# Altium PCB PCB2.PcbDoc
Units mm, origin at the board's own origin, x right, y up, seen from the top; angles counter-clockwise.
Board outline 117.23 x 67.03 mm, 2 copper layers (Top Layer, Bottom Layer); 38 components, 28 nets, 198 pads, 268 vias.
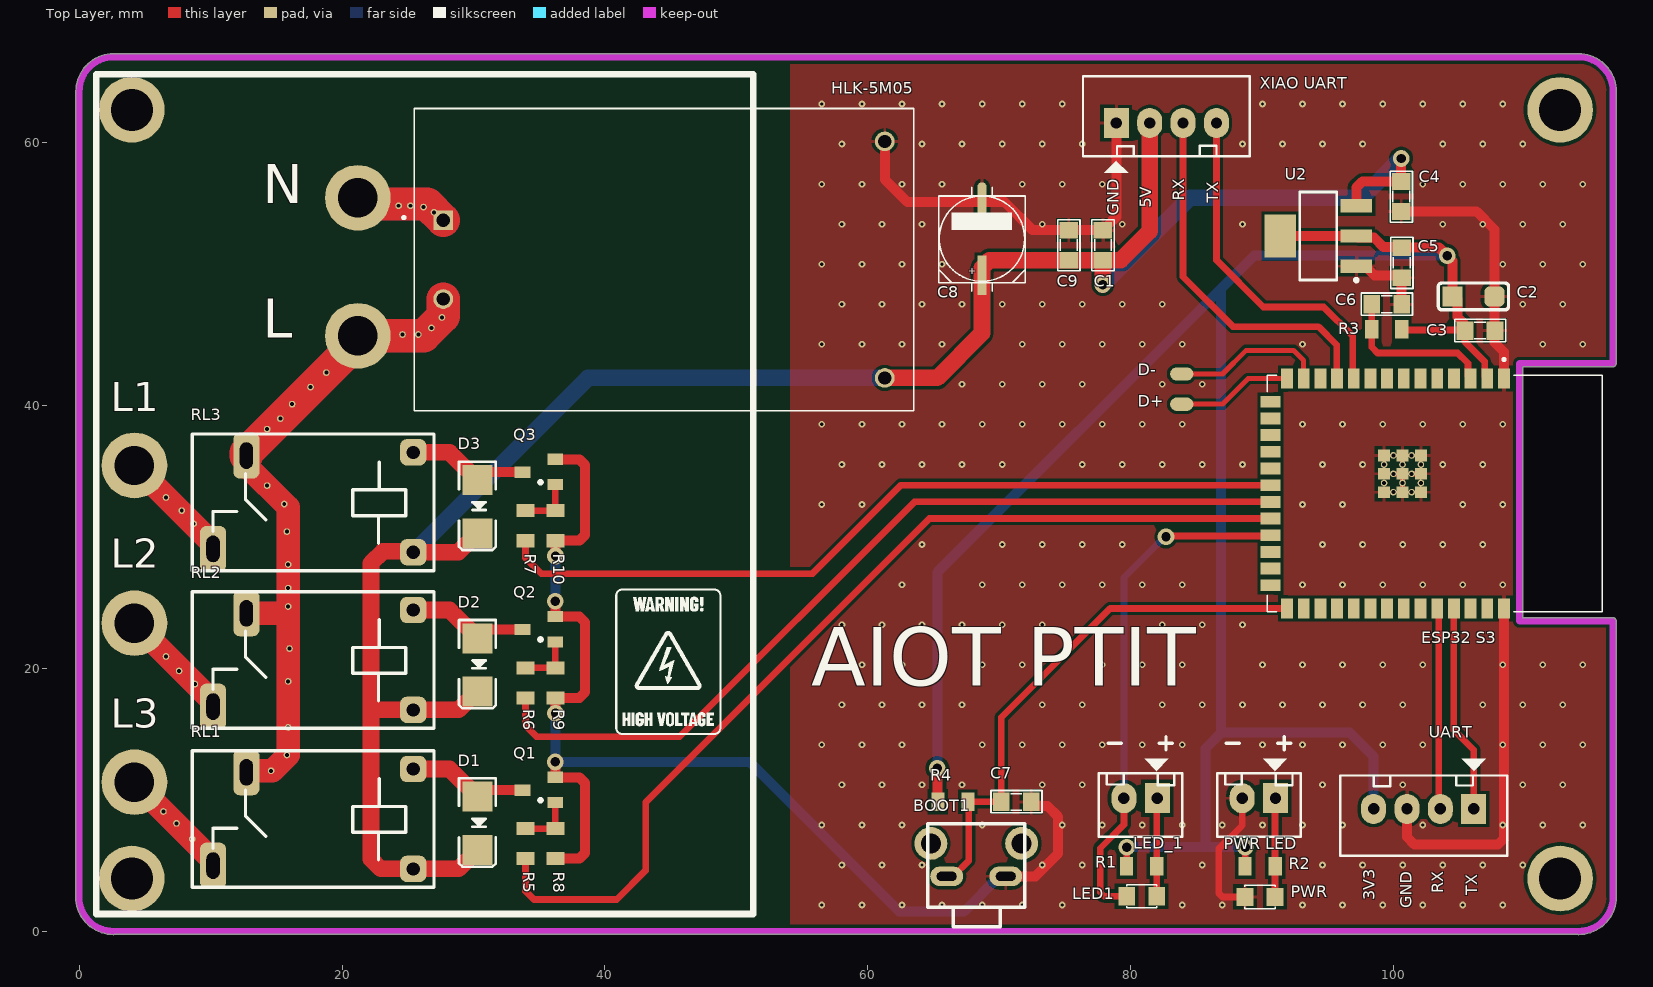
[diagram p0: Top Layer view]
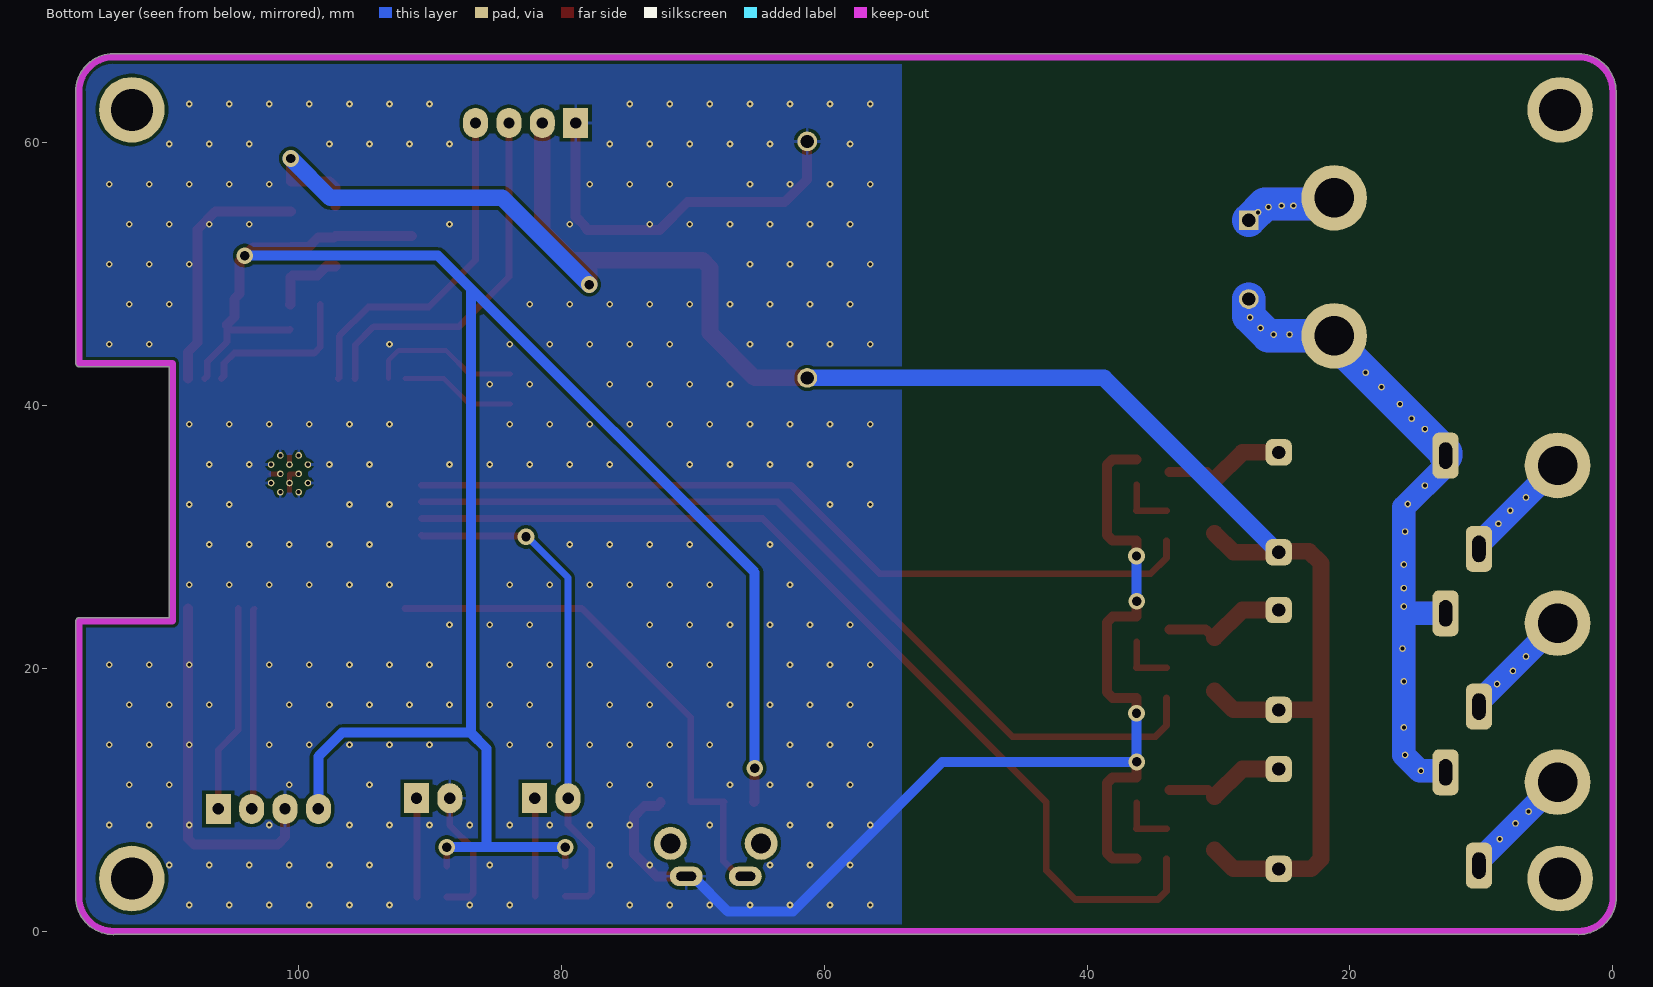
[diagram p1: Bottom Layer view, seen from below]
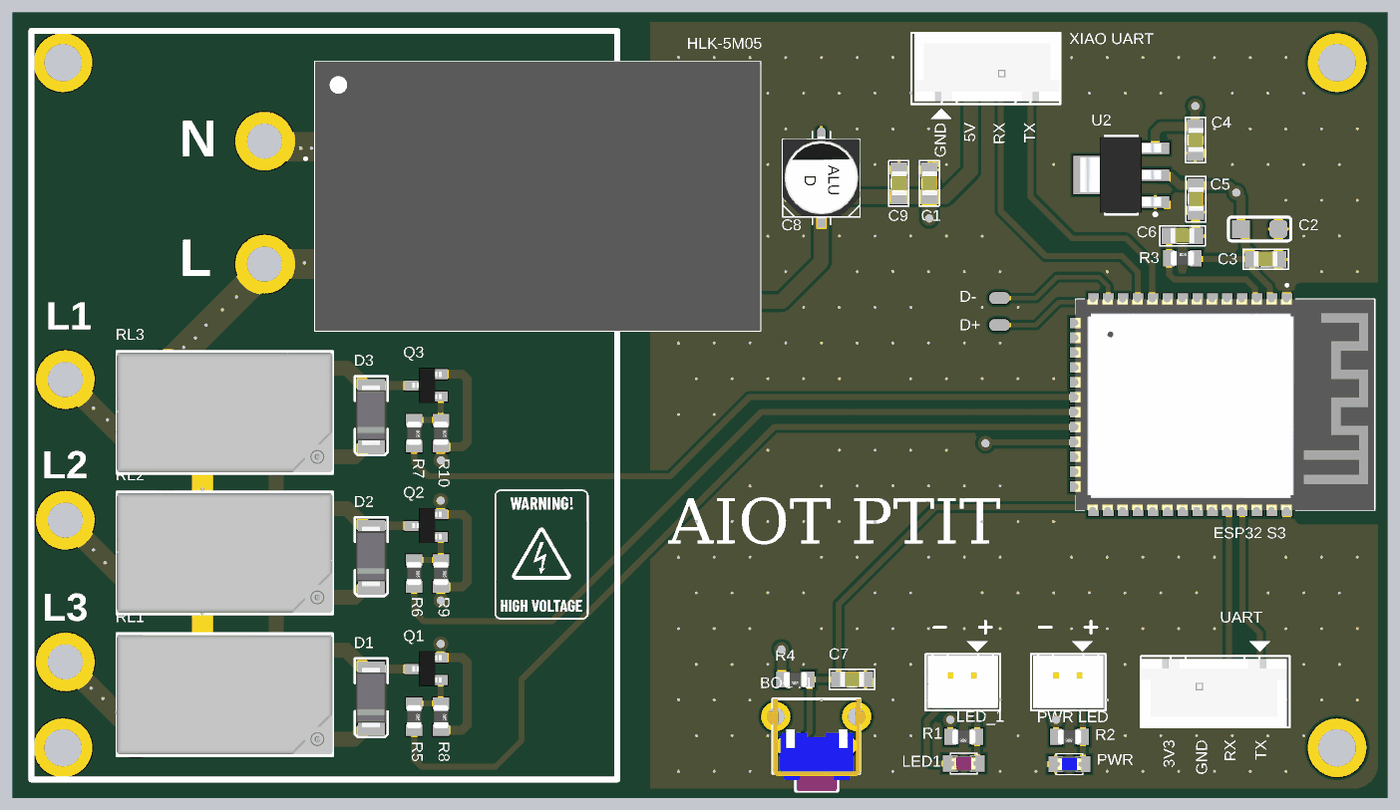
[diagram p2: 3D render of the assembled board from above, using the file's embedded part models]

## Layer stack, top to bottom
Top Solder: solder mask 0.0102, Solder Resist, Dk 3.5
Top Layer: signal copper 0.0356
Dielectric 1: dielectric 0.32, FR-4, Dk 4.8
Bottom Layer: signal copper 0.0356
Bottom Solder: solder mask 0.0102, Solder Resist, Dk 3.5

## Board outline
-0.265,2.6 cw(c-0.01,2.6) -0.254,2.672 -0.254,63.9 cw(c2.61,63.9) 2.61,66.765 cw(c2.61,66.51) 2.683,66.754 114.028,66.754 cw(c114.1,66.51) 114.1,66.765 cw(c114.1,63.9) 116.965,63.9 cw(c116.71,63.9) 116.954,63.828 116.954,43.2 cw(c116.7,43.2) 116.7,42.946 109.854,42.946 109.854,23.854 116.7,23.854 cw(c116.7,23.6) 116.954,23.6 116.954,2.672 cw(c116.71,2.6) 116.965,2.6 cw(c114.1,2.6) 114.1,-0.265 cw(c114.1,-0.01) 114.028,-0.254 2.672,-0.254 cw(c2.6,-0.01) 2.6,-0.265 cw(c2.6,2.6)

## Design rules (kind name [scope] priority, off if disabled: settings)
Clearance [All] p1: gap=0.254 ignorepadtopadclearanceinfootprint=FALSE except(0: Arc-Hole Track-Hole SMDPad-Hole THPad-Hole Via-Hole Fill-Hole Poly-Hole Region-Hole Text-Hole)
PolygonConnect [All] p1: connectstyle=Relief reliefconductorwidth=0.254 reliefentries=4 polygonreliefangle="90 Angle" airgapwidth=0.254
RoutingVias [All] p1: holewidth=0.711 width=1.27 viastyle="Through Hole" minholewidth=0.711 minwidth=1.27 maxholewidth=0.711 maxwidth=1.27
SolderMaskExpansion [All] p1: expansion=0.102 istentingtop=FALSE
Width Width_Power [InNetClass('Power')] p1: maxlimit=2.54 minlimit=0.254 preferedwidth=0.762
Width Width_Signal [All] p2: maxlimit=1.27 minlimit=0.254 preferedwidth=0.635
30 further rules are at their usual default settings.

## Components (designator, comment, footprint, x,y, rotation, side; value= is the part's Value field where it differs from the comment)
BOOT1 "SW" "TACTILE SWITCH TC-0203" 68.261,4.245 r0 top value="Button chip 4 pin"
C1 "10uF" SM-0805 77.9,52.2 r90 top value=103
C2 "CAP_TANTALUM_SMD" CAP_TANTALUM_3216 106.1,48.3 r0 top
C3 "100nF" SM-0805 106.6,45.7 r180 top value=103
C4 "10uF" SM-0805 100.6,55.9 r90 top value=103
C5 "10uF" SM-0805 100.639,50.864 r90 top value=103
C6 "100nF" SM-0805 99.5,47.7 r180 top value=103
C7 "100nF" SM-0805 71.309,9.833 r180 top value=103
C8 "22uF/25V" CAP-ALU-SMD-D 68.7,52.694 r90 top
C9 "100nF" SM-0805 75.3,52.2 r90 top value=103
D1 "FR207" DIO-SMD-106 30.3,8.2 r90 top value=1N5007
D2 "FR207" DIO-SMD-106 30.3,20.25 r90 top value=1N5007
D3 "FR207" DIO-SMD-106 30.3,32.3 r90 top value=1N5007
"ESP32 S3" "ESP32-S3-WROOM" ESP32-S3-WROOM-1 103.16,33.3 r270 top
HLK-5M05 "Power AC-DC Hi-Link" HLK-5M05 44.5,51.1 r0 top
LED1 "LED" LED-0805-Red 81.995,2.656 r180 top value="LED 3 - 5 ly 2 Colour"
LED_1 "Header2" Header2 82.04,10.113 r180 top
PWR "LED" LED-0805-Blue 91,2.6 r180 top value="LED 3 - 5 ly 2 Colour"
"PWR LED" "Header2" Header2 91.04,10.113 r180 top
Q1 "C1815" SOT23 34.975,10.719 r90 top
Q2 "C1815" SOT23 34.975,22.951 r90 top
Q3 "C1815" SOT23 34.975,34.918 r90 top
R1 "1K" RES-SMD-0805 80.852,4.942 r180 top
R2 "1.5K" RES-SMD-0805 89.869,4.942 r180 top
R3 "10K" RES-SMD-0805 99.5,45.8 r0 top
R4 "10K" RES-SMD-0805 66.483,9.833 r180 top
R5 "1K" RES-SMD-0805 33.959,6.655 r270 top
R6 "1K" RES-SMD-0805 33.959,18.887 r270 top
R7 "1K" RES-SMD-0805 33.959,30.854 r270 top
R8 "10K" RES-SMD-0805 36.245,6.655 r270 top
R9 "10K" RES-SMD-0805 36.245,18.887 r270 top
R10 "10K" RES-SMD-0805 36.245,30.854 r270 top
RL1 "RELAY 5A" "RELAY 5A" 17.8,8.535 r180 top
RL2 "RELAY 5A" "RELAY 5A" 17.8,20.635 r180 top
RL3 "RELAY 5A" "RELAY 5A" 17.8,32.635 r180 top
U2 "AMS1117" SOT223-4N 94.289,52.896 r180 top
UART "Header4" Header4 106.12,9.3 r180 top
"XIAO UART" "Header4" Header4 78.92,61.5 r0 top

## Footprints (in the part's own frame and the unit in brackets; to place one, negate y for a bottom-side part, rotate by r counter-clockwise, add the part's x,y. Pads: shape width x height; smd on the part's side, far side on the other; paste and mask are expansions set on the pad)
CAP-ALU-SMD-D [mm]
  rect 3x0.7 smd: 1(-2.794,0)
  oval 3x0.7 smd: 2(2.794,0)
  silkscreen extent -4,-3.3 3.93,3.3, body extent -3.5,-3.3 3.5,3.3, height 5.4
CAP_TANTALUM_3216 [mil]
  rect 60x60 smd: 1(-62.99,0)
  rrect50% 60x60 smd: 2(62.99,0)
  silkscreen extent -105,-40 105,40, body extent -67,-35 67,35, height 67
DIO-SMD-106 [mil]
  rect 90x90.55 smd: 1(80,0) 2(-80,0)
  silkscreen extent -130,-55 135,55, body extent -99,-50 106,52, height 95
ESP32-S3-WROOM-1 [mm]
  rect 1.5x0.9 smd: 1(-8.75,5.26) 2(-8.75,3.99) 3(-8.75,2.72) 4(-8.75,1.45) 5(-8.75,0.18) 6(-8.75,-1.09) 7(-8.75,-2.36) 8(-8.75,-3.63) 9(-8.75,-4.9) 10(-8.75,-6.17) 11(-8.75,-7.44) 12(-8.75,-8.71) 13(-8.75,-9.98) 14(-8.75,-11.25) 27(8.75,-11.25) 28(8.75,-9.98) 29(8.75,-8.71) 30(8.75,-7.44) 31(8.75,-6.17) 32(8.75,-4.9) 33(8.75,-3.63) 34(8.75,-2.36) 35(8.75,-1.09) 36(8.75,0.18) 37(8.75,1.45) 38(8.75,2.72) 39(8.75,3.99) 40(8.75,5.26)
  rect 0.9x1.5 smd: 15(-6.985,-12.5) 16(-5.715,-12.5) 17(-4.445,-12.5) 18(-3.175,-12.5) 19(-1.905,-12.5) 20(-0.635,-12.5) 21(0.635,-12.5) 22(1.905,-12.5) 23(3.175,-12.5) 24(4.445,-12.5) 25(5.715,-12.5) 26(6.985,-12.5)
  rect 0.9x0.9 smd: 41(-2.9,-2.46) 41(-2.9,-1.06) 41(-2.9,-3.86) 41(-1.5,-1.06) 41(-1.5,-2.46) 41(-1.5,-3.86) 41(-0.1,-1.06) 41(-0.1,-2.46) 41(-0.1,-3.86)
  round 0.508 hole 0.3 mask+0: 41(-2.9,-1.76) 41(-2.9,-3.16) 41(-2.2,-2.46) 41(-2.2,-1.06) 41(-2.2,-3.86) 41(-1.5,-1.76) 41(-1.5,-3.16) 41(-0.8,-1.06) 41(-0.8,-2.46) 41(-0.8,-3.86) 41(-0.1,-1.76) 41(-0.1,-3.16)
  silkscreen extent -10.3,-12.75 9,12.75, body extent -9,-12.8 9,12.7, height 3.25
Header2 [mil] "CON2"
  rect 75x90 hole 34: 1(0,0)
  oval 75x90 hole 34: 2(100,0)
  silkscreen extent -75,-118 175,115, body extent -68,-70 168,107, height 236
Header4 [mil] "CON4"
  rect 75x90 hole 34: 1(0,0)
  oval 75x90 hole 34: 2(100,0) 3(200,0) 4(300,0)
  silkscreen extent -100,-150 400,140, body extent -90,-90 398,136, height 276
HLK-5M05 [mm]
  rect 1.5x1.5 / inner round 1.5 / far side rect 1.5x1.5 hole 1: 1(-16.8,3)
  round 1.5 hole 1: 2(-16.8,-3) 3(16.8,9) 4(16.8,-9)
  silkscreen extent -19.9,-11.5 19,11.5, body extent -19,-11.5 19,11.5, height 18.3
LED-0805-Blue [mil]
  rect 50x55 smd: 1(0,0) 2(90,0)
  silkscreen extent 0,-35 90,35, body extent 5,-25 85,25, height 43
LED-0805-Red [mil]
  rect 50x55 smd: 1(0,0) 2(90,0)
  silkscreen extent 0,-35 90,35, body extent 5,-25 85,25, height 43
"RELAY 5A" [mm]
  rrect50% 2x2 hole 1: 1(-7.62,3.8) 2(-7.62,-3.8)
  rrect50% 2x3.5 hole 1 slot 2 at 90 deg: 3(7.62,3.55) 4(5.08,-3.55)
  silkscreen extent -9.2,-5.2 9.2,5.2, body extent -9.2,-5.11 9.2,5.09, height 15.81
RES-SMD-0805 [mil]
  rect 39.37x55 smd: 1(-45,0) 2(45,0)
  body extent -39,-25 39,25, height 31
SM-0805 [mil] "Compoment SMD 80x50mil"
  rect 50x55 smd: 1(-45,0) 2(45,0)
  silkscreen extent -77,-34 76,33, body extent -40,-27 40,23, height 24
SOT23 [mm] "SOT 23 _ 1-3-2"
  rect 0.85x1.2 smd: 1(-0.94,-1.245) 2(0.985,-1.25) 3(0.005,1.25)
  silkscreen extent -0.88,-0.25 -0.64,0, body extent -1.47,-1.33 1.53,1.17, height 1.06
SOT223-4N [mm] "SOT223, 4-Leads, Body 6.5x3.5mm, Pitch 2.3mm, Lead Span 7mm, IPC Medium Density"
  rect 2.4x1 smd: 1(-2.9,2.3) 2(-2.9,0) 3(-2.9,-2.3)
  rect 2.4x3.3 smd: 4(2.9,0)
  silkscreen extent -3.03,-3.35 1.4,3.47, body extent -3.39,-3.27 3.5,3.23, height 1.72
"TACTILE SWITCH TC-0203" [mm]
  oval 2.5x1.5 hole 0.7 slot 1.5 at 0 deg: 1(-2.25,-0.075) 2(2.25,-0.075)
  round 2.5 hole 1.5: 3(3.45,2.425) 4(-3.45,2.425)
  silkscreen extent -3.7,-3.92 3.7,3.92, body extent -4.2,-3.96 4.3,3.94, height 7.4

## Part data
BOOT1: library part SW4-DIP, "Switch button 4 pin"
C1 C3 C4 C5 C6 C7 C9: library part CM, "Cap SMD"
C2: "Capacitor, Tantalum", Package="1411 AVX Corporation", Check_prices=https://www.snapeda.com/parts/TAJB475K025RNJ/AVX/view-part/?ref=eda, MF=AVX, MP=TAJB475K025RNJ, SnapEDA_Link=https://www.snapeda.com/parts/TAJB475K025RNJ/AVX/view-part/?ref=snap
C8: library part CN-ALU-SMD, "Polarized Capacitor (Axial)", LatestRevisionDate=17-Jul-2002, LatestRevisionNote="Re-released for DXP Platform.", PackageReference=POLAR0.8, Published=8-Jun-2000, Publisher="Altium Limited"
D1 D2 D3: library part "Diode SMD", "Default Diode", Code - JEDEC=DO-214-AB, Published=8-Jun-2000, Publisher="Altium Limited", Revision="July-2002: Re-released for DXP Platform."
"ESP32 S3": Package=None, Availability=Unavailable, MF="{'manufacturer': u'Espressif Systems'}", MP=ESP32-S3-WROOM-1-N8, Price=None
HLK-5M05: "HLK"
LED1 PWR: library part "LED SMD"
LED_1 "PWR LED": "Header IDC, 2 x 1 Pin Vertical 2.54mm Pitch (Non-Boxed, Male)", Manufacturer="W¨¹rth Elektronik eiSos GmbH", partNo=613002143121, ComponentLink1 Description=Manufacturer, ComponentLink1URL=http://www.we-online.com, ComponentLink2 Description=Datasheet, ComponentLink2URL=http://katalog.we-online.de/em/datasheet/6130xx143121.pdf, Created by="Karrer Zheng", Created Date="29 March 2013", NoPins=02
Q1 Q2 Q3: library part "Transitor SMD"
R1 R2 R3 R4 R5 R6 R7 R8 R9 R10: library part Res-SMD, "Resistor", Manufacturer="Generic Components", Class=Passive, Published=08/06/2000, Publisher="Altium Hobart Technology Centre"
RL1 RL2 RL3: "18.2 x 10.2 x 15.5 mm, 5 V, 5 A, SPST (1 Form A), Power Relay", Package=None, Check_prices=https://www.snapeda.com/parts/PR5-5V-200-1A/CUI+Devices/view-part/?ref=eda, CUI_purchase_URL=https://www.cuidevices.com/product/relays/power-relays/pr5-5v-200-1a?utm_source=snapeda.com&utm_medium=referral&utm_campaign=snapedaBOM, MF="CUI Devices", MP=PR5-5V-200-1A, SnapEDA_Link=https://www.snapeda.com/parts/PR5-5V-200-1A/CUI+Devices/view-part/?ref=snap
U2: "IC"
UART "XIAO UART": "Header IDC, 4 x 1 Pin Vertical 2.54mm Pitch (Non-Boxed, Male)", Manufacturer="W¨¹rth Elektronik eiSos GmbH", partNo=613002143121, ComponentLink1 Description=Manufacturer, ComponentLink1URL=http://www.we-online.com, ComponentLink2 Description=Datasheet, ComponentLink2URL=http://katalog.we-online.de/em/datasheet/6130xx143121.pdf, Created by="Karrer Zheng", Created Date="29 March 2013", NoPins=02

## Free pads (board coordinates)
  round 5 hole 3.2: ""(4,4) ""(4,62.5) ""(112.7,4) ""(112.7,62.5)
  round 5 hole 3: ""(4.2,11.335) ""(4.2,23.435) ""(4.2,35.435) ""(21.2,45.3) ""(21.2,55.8)
  round 0.508 hole 0.3 mask+0.102: ""(6.4,9.1) ""(6.6,20.9) ""(6.6,33) ""(7.4,8.2) ""(7.6,19.8) ""(7.8,32) ""(8.6,7) ""(8.7,31) ""(8.8,18.8) ""(14.3,33.9) ""(14.3,38.2) ""(14.6,12.2) ""(15.3,39) ""(15.6,32.5) ""(15.8,13.4) ""(15.8,30.4) ""(15.9,15.5) ""(15.9,19) ""(15.9,24.7) ""(15.9,26.1) ""(15.9,27.9) ""(16,21.5) ""(16.2,40.1) ""(17.6,41.4) ""(18.8,42.5) ""(24.3,55.2) ""(24.6,45.4) ""(25.2,55.2) ""(25.8,45.4) ""(26.2,55.1) ""(26.8,45.9) ""(27,54.7) ""(27.6,46.7)
  oval 1.778x1.016 smd: ""(83.9,40.1) ""(83.9,42.4)

## Via types
v1: diameter 0.508, hole 0.254, Top Layer to Bottom Layer, tented both sides, 257 vias
v2: diameter 1.27, hole 0.711, Top Layer to Bottom Layer, tented both sides, 11 vias

## Nets (pads, with @x,y where several pads share a name; then routed paths per layer and width w, separated by ;. In a path a pad name is that pad's centre, name@x,y a point inside that pad or via, vN(x,y) a via of type N, cw(c..) or ccw(c..) an arc to the next point about the centre after c; other vN are vias at no path point)
3V3: "ESP32 S3.2" C2.1 C3.2 C5.2 R1.2 R2.2 R3.2 R4.2 U2.2 U2.4 UART.4 | length 166.3
  Top Layer w0.508: R1.2 v2(79.709,6.391) ; R2.2 v2(88.726,6.391) ; R3.2 100.693,45.75 105.407,45.75 C3.2 ; C3.2@105.457,46.1 C3.2 ; 107.15,42.05 106.954,42.246 106.954,43.346 105.457,44.843 C3.2
  Top Layer w0.762: v2(65.3,12.4) 65.32,12.38 65.32,9.853 R4.2 ; U2.4 U2.2 97.308,52.777 98.523,52.777 99.253,52.047 100.599,52.047 C5.2 103.493,52.007 v2(104.1,51.4) 104.5,51 104.5,48.5 104.881,48.119 104.881,46.74 105.457,46.163 C3.2@105.457,46.1
  Bottom Layer w0.762: v2(65.3,12.4) 65.3,27.3 86.9,48.9 ; v2(79.709,6.391) 85.7,6.391 ; v2(88.726,6.391) 85.7,6.391 ; UART.4 98.5,13.3 96.7,15.1 86.9,15.1 ; v2(104.1,51.4) 89.4,51.4 86.9,48.9 ; 85.7,6.391 85.7,13.9 86.9,15.1 ; 86.9,15.1 86.9,48.9
5V: "XIAO UART.2" C1.1 C4.2 C8.1 C9.1 D1.2 D2.2 D3.2 HLK-5M05.4 RL1.1 RL2.1 RL3.1 U2.3 | length 162.1
  Top Layer w0.762: U2.3 97.189,56.589 97.643,57.043 C4.2 v2(100.6,58.8)
  Top Layer w1.27: D1.2 30.293,6.168 28.86,4.735 22.944,4.735 22.2,5.479 22.2,16.739 ; D2.2@30.3,18.268 30.293,18.268 28.86,16.835 RL2.1 22.295,16.835 22.2,16.739 ; D3.2 30.293,30.268 28.86,28.835 RL3.1 25.285,28.7 25.085,28.9 23.1,28.9 22.2,28 22.2,16.739 ; HLK-5M05.4 65.3,42.1 68.7,45.5 68.7,50.48 69.277,51.057 C1.1 ; v2(77.9,49.2) C1.1 ; 81.46,61.5 81.46,53.26 79.257,51.057 C1.1
  Bottom Layer w1.27: RL3.1 25.785,29.2 25.8,29.2 38.7,42.1 HLK-5M05.4 ; v2(77.9,49.2) 84.5,55.8 97.6,55.8 v2(100.6,58.8)
D+: "ESP32 S3.14" pad.@83.9,40.1 | length 8.8
  Top Layer w0.381: pad.@83.9,40.1 87,40.1 88.95,42.05 91.91,42.05
D-: "ESP32 S3.13" pad.@83.9,42.4 | length 11.7
  Top Layer w0.381: pad.@83.9,42.4 87,42.4 88.8,44.2 92.4,44.2 93.18,43.42 93.18,42.05
EN_1: "ESP32 S3.3" C6.2 R3.1 | length 12.3
  Top Layer w0.508: C6.2 R3.1 98.357,44.443 98.8,44 104.9,44 105.684,43.216 105.684,42.246 105.88,42.05
GND: "ESP32 S3.1" "ESP32 S3.40" "ESP32 S3.41" "PWR LED.2" "XIAO UART.1" BOOT1.2 C1.2 C2.2 C3.1 C4.1 C5.1 C6.1 C7.1 C8.2 C9.2 HLK-5M05.3 PWR.2 Q1.2 Q2.2 Q3.2 R8.2 R9.2 R10.2 U2.1 UART.3 | length 188.5
  Top Layer w0.381: 100,34.8 100.7,34.8 100.7,34.1 100.7,33.4 ; 100.7,35.5 100.7,36.2 ; 101.4,34.8 102.1,34.8
  Top Layer w0.508: 88.505,10.057 88.505,8.044 86.705,6.244 86.705,2.898 87.003,2.6 PWR.2
  Top Layer w0.762: v2(36.225,12.875) Q1.2 38.054,11.704 38.5,11.258 38.5,5.958 38.054,5.512 R8.2 ; v2(36.225,25.107) Q2.2 38.054,23.936 38.5,23.49 38.5,18.19 38.054,17.744 R9.2 v2(36.245,16.574) ; Q3.2 38.054,35.903 38.5,35.457 38.5,30.157 38.054,29.711 R10.2 v2(36.245,28.541) ; HLK-5M05.3 61.3,57.2 63.012,55.488 C8.2 70.412,55.488 72.557,53.343 C9.2 C1.2@78.043,53.343 ; BOOT1.2 72.77,4.17 74.5,5.9 74.5,8.7 73.684,9.516 72.706,9.516 72.452,9.77 C7.1 ; C1.2@77.963,53.343 78.217,53.597 78.217,53.66 78.92,54.363 78.92,61.5 ; U2.1 97.889,50.596 98.585,49.9 100.46,49.9 C5.1 100.641,49.719 100.641,47.702 C6.1 ; C4.1 106.343,54.757 107.7,53.4 107.7,44.8 108.42,44.08 108.42,42.05 ; UART.3 101.04,7.16 101.6,6.6 107.974,6.6 108.42,7.046 108.42,24.55
  Bottom Layer w0.762: v2(36.225,25.107) 36.235,25.117 36.235,28.531 v2(36.245,28.541) ; v2(36.245,16.574) 36.235,16.564 36.235,12.885 v2(36.225,12.875) 51.025,12.875 62.4,1.5 67.341,1.5 70.011,4.17 BOOT1.2
  other v1: 56.515,1.984 59.563,1.984 62.611,1.984 65.659,1.984 68.707,1.984 71.755,1.984 74.803,1.984 83.947,1.984 86.995,1.984 93.091,1.984 96.139,1.984 99.187,1.984 102.235,1.984 105.283,1.984 108.331,1.984 58.039,5.032 61.087,5.032 64.135,5.032 73.279,5.032 76.327,5.032 85.471,5.032 94.615,5.032 97.663,5.032 100.711,5.032 103.759,5.032 106.807,5.032 109.855,5.032 56.515,8.08 59.563,8.08 62.611,8.08 68.707,8.08 74.803,8.08 77.851,8.08 80.899,8.08 83.947,8.08 86.995,8.08 90.043,8.08 93.091,8.08 96.139,8.08 102.235,8.08 108.331,8.08 111.379,8.08 114.427,8.08 58.039,11.128 61.087,11.128 64.135,11.128 67.183,11.128 73.279,11.128 76.327,11.128 94.615,11.128 100.711,11.128 109.855,11.128 112.903,11.128 56.515,14.176 59.563,14.176 62.611,14.176 68.707,14.176 71.755,14.176 74.803,14.176 77.851,14.176 80.899,14.176 83.947,14.176 90.043,14.176 93.091,14.176 96.139,14.176 99.187,14.176 102.235,14.176 108.331,14.176 111.379,14.176 114.427,14.176 58.039,17.224 61.087,17.224 64.135,17.224 67.183,17.224 73.279,17.224 76.327,17.224 82.423,17.224 85.471,17.224 88.519,17.224 91.567,17.224 94.615,17.224 97.663,17.224 100.711,17.224 106.807,17.224 109.855,17.224 112.903,17.224 56.515,20.272 59.563,20.272 62.611,20.272 68.707,20.272 71.755,20.272 77.851,20.272 80.899,20.272 83.947,20.272 90.043,20.272 93.091,20.272 96.139,20.272 99.187,20.272 102.235,20.272 108.331,20.272 111.379,20.272 114.427,20.272 58.039,23.32 61.087,23.32 64.135,23.32 67.183,23.32 70.231,23.32 73.279,23.32 82.423,23.32 85.471,23.32 88.519,23.32 62.611,26.368 68.707,26.368 71.755,26.368 74.803,26.368 77.851,26.368 80.899,26.368 83.947,26.368 93.091,26.368 96.139,26.368 99.187,26.368 102.235,26.368 105.283,26.368 108.331,26.368 64.135,29.416 70.231,29.416 73.279,29.416 76.327,29.416 79.375,29.416 94.615,29.416 97.663,29.416 100.711,29.416 103.759,29.416 106.807,29.416 56.515,32.464 59.563,32.464 93.091,32.464 96.139,32.464 105.283,32.464 108.331,32.464 58.039,35.512 61.087,35.512 64.135,35.512 67.183,35.512 70.231,35.512 76.327,35.512 79.375,35.512 82.423,35.512 85.471,35.512 88.519,35.512 94.615,35.512 97.663,35.512 103.759,35.512 106.807,35.512 56.515,38.56 59.563,38.56 62.611,38.56 65.659,38.56 68.707,38.56 71.755,38.56 74.803,38.56 77.851,38.56 80.899,38.56 83.947,38.56 93.091,38.56 96.139,38.56 99.187,38.56 102.235,38.56 105.283,38.56 108.331,38.56 67.183,41.608 70.231,41.608 73.279,41.608 76.327,41.608 82.423,41.608 85.471,41.608 56.515,44.656 59.563,44.656 62.611,44.656 65.659,44.656 71.755,44.656 74.803,44.656 77.851,44.656 80.899,44.656 83.947,44.656 93.091,44.656 111.379,44.656 114.427,44.656 58.039,47.704 61.087,47.704 64.135,47.704 67.183,47.704 70.231,47.704 73.279,47.704 76.327,47.704 79.375,47.704 82.423,47.704 109.855,47.704 112.903,47.704 56.515,50.752 59.563,50.752 62.611,50.752 65.659,50.752 108.331,50.752 111.379,50.752 114.427,50.752 58.039,53.8 61.087,53.8 64.135,53.8 67.183,53.8 70.231,53.8 73.279,53.8 79.375,53.8 88.519,53.8 103.759,53.8 106.807,53.8 109.855,53.8 112.903,53.8 56.515,56.848 59.563,56.848 62.611,56.848 65.659,56.848 71.755,56.848 74.803,56.848 77.851,56.848 102.235,56.848 105.283,56.848 108.331,56.848 111.379,56.848 114.427,56.848 58.039,59.896 64.135,59.896 67.183,59.896 70.231,59.896 73.279,59.896 76.327,59.896 88.519,59.896 91.567,59.896 94.615,59.896 97.663,59.896 103.759,59.896 106.807,59.896 109.855,59.896 56.515,62.944 59.563,62.944 62.611,62.944 65.659,62.944 68.707,62.944 71.755,62.944 74.803,62.944 90.043,62.944 93.091,62.944 96.139,62.944 99.187,62.944 102.235,62.944 105.283,62.944 108.331,62.944
IO0_1: "ESP32 S3.27" BOOT1.1 C7.2 R4.1 | length 40.8
  Top Layer w0.508: BOOT1.1 66.511,4.17 67.7,5.359 67.7,9.759 R4.1 C7.2 70.166,16.266 78.45,24.55 91.91,24.55
L: HLK-5M05.2 pad.@14.3,33.9 pad.@14.3,38.2 pad.@14.6,12.2 pad.@15.3,39 pad.@15.6,32.5 pad.@15.8,13.4 pad.@15.8,30.4 pad.@15.9,15.5 pad.@15.9,19 pad.@15.9,24.7 pad.@15.9,26.1 pad.@15.9,27.9 pad.@16,21.5 pad.@16.2,40.1 pad.@17.6,41.4 pad.@18.8,42.5 pad.@21.2,45.3 pad.@24.6,45.4 pad.@25.8,45.4 pad.@26.8,45.9 pad.@27.6,46.7 RL1.4 RL2.4 RL3.4 | length 104.2
  Top Layer w1.778: RL1.4 12.72,12.089 12.831,12.2 14.7,12.2 15.9,13.4 15.9,24.3 ; RL2.4 15.785,24.185 15.9,24.3 ; RL3.4 12.72,35.435 15.9,32.255 15.9,24.3
  Top Layer w2.54: RL3.4 12.72,36.395 21.2,44.875 21.2,45.3 26.212,45.3 27.7,46.788 HLK-5M05.2
  Bottom Layer w1.778: RL1.4 12.72,12.089 12.831,12.2 14.7,12.2 15.9,13.4 15.9,24.3 ; RL2.4 15.785,24.185 15.9,24.3 ; RL3.4 12.72,35.435 15.9,32.255 15.9,24.3
  Bottom Layer w2.54: RL3.4 12.72,36.395 21.2,44.875 21.2,45.3 26.212,45.3 27.7,46.788 HLK-5M05.2
L1: pad.@4.2,11.335 pad.@6.4,9.1 pad.@7.4,8.2 pad.@8.6,7 RL1.3 | length 15.8
  Top Layer w1.778: pad.@4.2,11.335 RL1.3@9.8,5.735
  Bottom Layer w1.778: pad.@4.2,11.335 RL1.3@9.8,5.735
L2: pad.@4.2,23.435 pad.@6.6,20.9 pad.@7.6,19.8 pad.@8.8,18.8 RL2.3 | length 15.8
  Top Layer w1.778: pad.@4.2,23.435 RL2.3@9.8,17.835
  Bottom Layer w1.778: pad.@4.2,23.435 RL2.3@9.8,17.835
L3: pad.@4.2,35.435 pad.@6.6,33 pad.@7.8,32 pad.@8.7,31 RL3.3 | length 18.1
  Top Layer w1.778: pad.@4.58,35.435 4.2,35.435 RL3.3@9.8,29.835 ; RL3.3 RL3.3@10.18,29.835
  Bottom Layer w1.778: pad.@4.58,35.435 4.2,35.435 RL3.3@9.8,29.835 ; RL3.3 RL3.3@10.18,29.835
LED: "ESP32 S3.23" LED1.2 LED_1.2 | length 39.3
  Top Layer w0.508: LED_1.2 79.5,8.1 77.7,6.3 77.7,2.954 77.998,2.656 LED1.2 ; v2(82.7,30) 82.762,30.063 90.597,30.063 90.66,30.125
  Bottom Layer w0.508: LED_1.2 79.5,26.9 82.6,30 v2(82.7,30)
N: HLK-5M05.1 pad.@21.2,55.8 pad.@24.3,55.2 pad.@25.2,55.2 pad.@26.2,55.1 pad.@27,54.7 | length 14.4
  Top Layer w2.54: pad.@21.2,55.8 21.671,55.329 26.471,55.329 HLK-5M05.1
  Bottom Layer w2.54: pad.@21.2,55.8 21.671,55.329 26.471,55.329 HLK-5M05.1
NetD1_1: D1.1 Q1.3 RL1.2 | length 9.4
  Top Layer w0.762: D1.1 30.792,10.724 Q1.3
  Top Layer w1.27: RL1.2 28.19,12.335 30.293,10.232 D1.1
NetD2_1: D2.1 Q2.3 RL2.2 | length 9.5
  Top Layer w0.762: D2.1 30.974,22.956 Q2.3
  Top Layer w1.27: RL2.2 28.19,24.435 30.293,22.332 D2.1@30.3,22.332
NetD3_1: D3.1 Q3.3 RL3.2 | length 9.4
  Top Layer w0.762: D3.1 30.891,34.923 Q3.3
  Top Layer w1.27: RL3.2 28.19,36.435 30.293,34.332 D3.1
NetLED1_1: LED1.1 LED_1.1 R1.1 | length 7.5
  Top Layer w0.508: LED1.1 81.995,10.068 LED_1.1
"NetPWR LED_1": "PWR LED.1" PWR.1 R2.1 | length 7.5
  Top Layer w0.508: PWR.1 91,10.073 91.04,10.113
NetQ1_1: Q1.1 R5.1 R8.1 | length 4.3
  Top Layer w0.508: R5.1 R8.1 36.232,7.811 36.232,9.766 Q1.1
NetQ2_1: Q2.1 R6.1 R9.1 | length 4.3
  Top Layer w0.508: R6.1 R9.1 36.232,20.043 36.232,21.998 Q2.1
NetQ3_1: Q3.1 R7.1 R10.1 | length 4.3
  Top Layer w0.508: R7.1 R10.1 36.232,32.01 36.232,33.965 Q3.1
RELAY1: "ESP32 S3.22" R5.2 | length 74.5
  Top Layer w0.508: R5.2 33.959,3.041 34.6,2.4 40.9,2.4 43.1,4.6 43.1,9.8 64.695,31.395 90.66,31.395
RELAY2: "ESP32 S3.21" R6.2 | length 66.6
  Top Layer w0.508: R6.2 33.959,15.641 34.8,14.8 45.7,14.8 63.565,32.665 90.66,32.665
RELAY3: "ESP32 S3.20" R7.2 | length 61.3
  Top Layer w0.508: R7.2 33.959,28.397 35.156,27.2 55.8,27.2 62.535,33.935 90.66,33.935
RXD0_1: "ESP32 S3.36" UART.2 | length 15.3
  Top Layer w0.381: 103.34,24.55 103.46,24.43 ; UART.2@103.46,9.42 UART.2
  Top Layer w0.508: UART.2@103.46,9.42 103.46,24.43
RXD1_1: "ESP32 S3.11" "XIAO UART.3" | length 28.1
  Top Layer w0.508: 84,61.5 84,49.8 87.8,46 94.3,46 95.7,44.6 95.7,42.07 95.72,42.05
TXD0_1: "ESP32 S3.37" UART.1 | length 15.9
  Top Layer w0.508: 104.61,24.55 104.61,15.29 106.12,13.78 UART.1
TXD1_1: "ESP32 S3.10" "XIAO UART.4" | length 26.5
  Top Layer w0.508: 86.54,61.5 86.54,51.06 90.1,47.5 94.7,47.5 96.921,45.279 96.921,42.119 96.99,42.05
pads on no net: "ESP32 S3.4" "ESP32 S3.5" "ESP32 S3.6" "ESP32 S3.7" "ESP32 S3.8" "ESP32 S3.9" "ESP32 S3.12" "ESP32 S3.15" "ESP32 S3.16" "ESP32 S3.17" "ESP32 S3.18" "ESP32 S3.19" "ESP32 S3.24" "ESP32 S3.25" "ESP32 S3.26" "ESP32 S3.28" "ESP32 S3.29" "ESP32 S3.30" "ESP32 S3.31" "ESP32 S3.32" "ESP32 S3.33" "ESP32 S3.34" "ESP32 S3.35" "ESP32 S3.38" "ESP32 S3.39" BOOT1.3 BOOT1.4

## Polygon pours and split planes (outlines as drawn)
GND on Top Layer "GND_L01_P000" (solid, remove dead copper, pour order 0): 54.1,66.4 118.7,66.4 118.7,-0.049 54.1,-0.049
GND on Bottom Layer "GND_L02_P001" (solid, remove dead copper, pour order 1): 54.1,66.449 118.7,66.449 118.7,0 54.1,0

## Keep-outs
Keep-Out Layer:
  lines w0.508: -0.01,2.6 ccw(c2.6,2.6) 2.6,-0.01 ; 0,2.6 0,63.9 cw(c2.61,63.9) 2.61,66.51 ; 2.6,0 114.1,0 ; 2.6,66.5 114.1,66.5 ; 114.1,-0.01 ccw(c114.1,2.6) 116.71,2.6 116.7,2.6 116.7,23.6 109.6,23.6 109.6,43.2 116.7,43.2 116.7,63.9 116.71,63.9 ccw(c114.1,63.9) 114.1,66.51

## Silkscreen, mask and mechanical layers (free items; w line width, h text height)
Top Overlay:
  drawing of 33 lines, arcs and shapes, not listed
  text "RX" at 84.4,55.562 h1.52 r90
  text "TX" at 87,55.415 h1.52 r90
  text "5V" at 81.9,55.032 h1.52 r90
  text "GND" at 79.4,54.454 h1.52 r90
  text "N" at 13.967,54.4 h5.08
  text "L" at 13.967,44.2 h5.08
  text "D-" at 80.55,42 h1.52
  text "D+" at 80.55,39.6 h1.52
  text "L1" at 2.391,38.8 h3.81
  text "L2" at 2.391,26.9 h3.81
  text "AIOT PTIT" at 55.7,17.2 h7.62
  text "L3" at 2.391,14.7 h3.81
  text "RX" at 104.1,2.862 h1.52 r90
  text "TX" at 106.7,2.715 h1.52 r90
  text "3V3" at 98.9,2.332 h1.52 r90
  text "GND" at 101.7,1.754 h1.52 r90

## Text inside footprints (layer, text, board x,y; h text height)
C8: Top Overlay "+" at 68.375,49.894 h0.89 r90
"ESP32 S3": Mechanical 13 "ANTENNA" at 112.66,37.8 h1.27 r270